# Altium PCB PCB_Wand Controller.pcbdoc
Units mm, origin at the board's own origin, x right, y up, seen from the top; angles counter-clockwise.
Board outline 158.8 x 145.8 mm, 2 copper layers (Top Layer, Bottom Layer); 32 components, 43 nets, 132 pads, 44 vias.
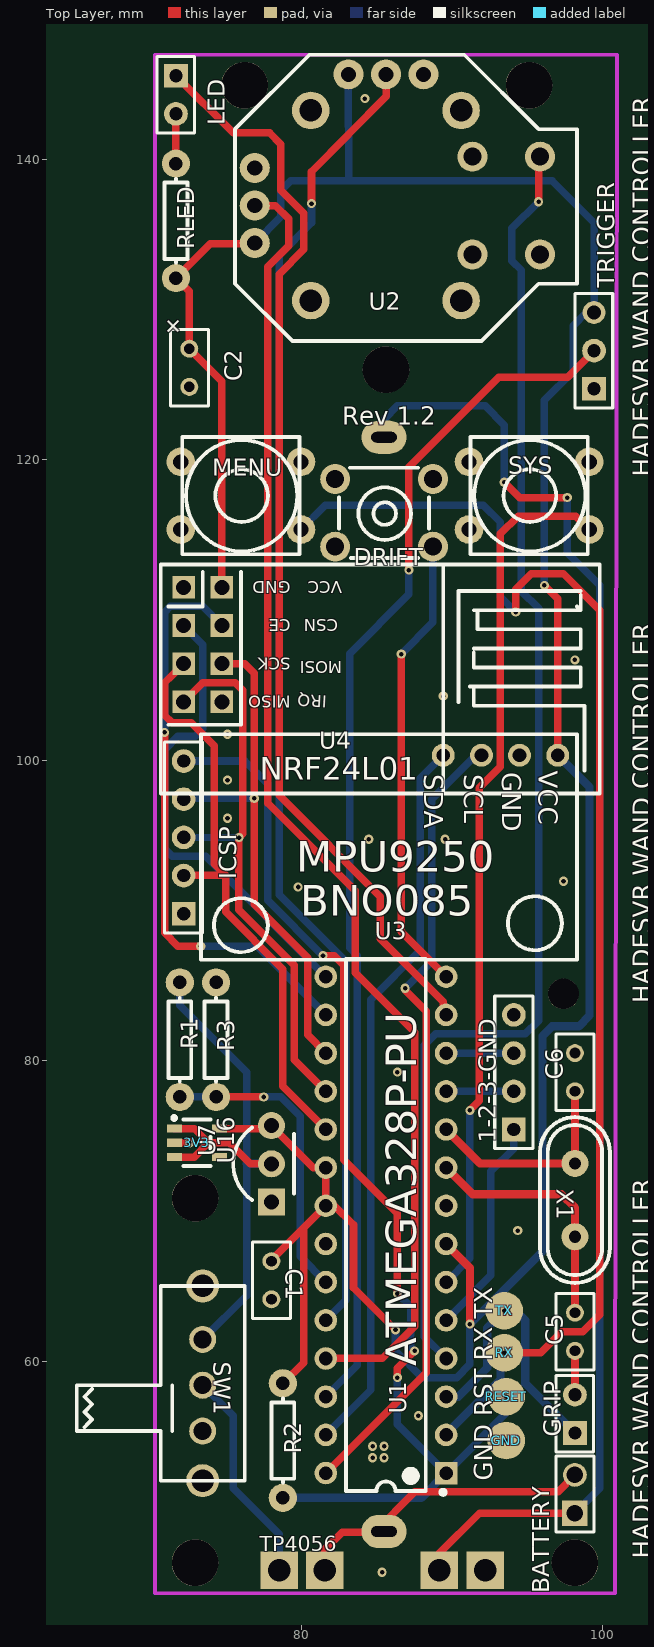
[diagram p0: Top Layer view]
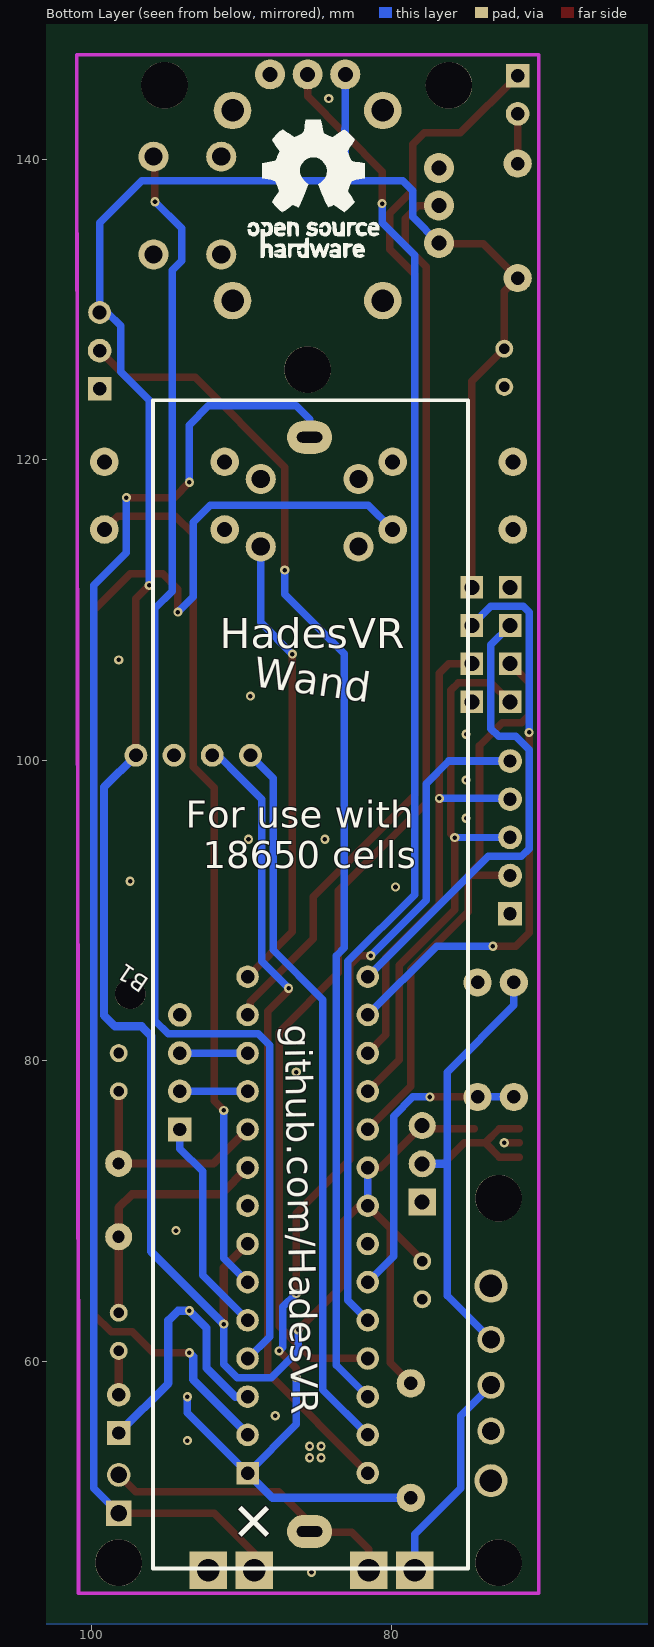
[diagram p1: Bottom Layer view, seen from below]

## Layer stack, top to bottom
Top Layer: signal copper (thickness not stored)
Dielectric: dielectric 0.32, FR-4, Dk 4.8
Bottom Layer: signal copper (thickness not stored)

## Board outline
184.201,25.4 25.4,25.4 25.4,171.196 184.201,171.196

## Components (designator, comment, footprint, x,y, rotation, side; value= is the part's Value field where it differs from the comment)
1-2-3-GND "HDR-M-2.54_1x4" HDR-M-2.54_1X4 94.107,79.248 r90 top
3V3 "LP5907MFX-3.0/NOPB" SOT-23-5_L3.0-W1.7-P0.95-LS2.8-BL 73.025,74.549 r270 top
#LOGO1 "Graphic_Logo_Open_Hardware_Small" OPEN_HARDWARE 248.793,212.344 r0 bottom
B1 "18650 Holder" BH-18650-A 85.471,85.09 r270 bottom
BATTERY "HDR-M-2.54_1x2" HDR-M-2.54_1X2 98.171,51.181 r270 top
C1 "100nF" RAD-0.1 77.978,65.405 r90 top
C2 "100nF" RAD-0.1 72.517,126.111 r90 top
C5 "22pF" RAD-0.1 98.171,61.976 r90 top
C6 "22pF" RAD-0.1 98.171,79.248 r270 top
DRIFT "button6*6*8" KEY-TH_4P-L6.0-W6.0-P4.50-LS7.5 85.471,116.459 r180 top
GND "RX" "TEST PAD FOOTPRINT" 93.599,54.737 r0 top
GRIP "HDR-F-2.54_1x2" HDR-F-2.54_1X2#1 98.171,56.515 r90 top
ICSP "HDR-M-2.54_1x5" HDR-M-2.54_1X5 72.136,94.869 r90 top
LED "HDR-F-2.54_1x2" HDR-F-2.54_1X2#2 71.628,144.272 r90 top
MENU "MenuBTN" SQUISHY_TACT_8*8*5 75.946,117.602 r180 top
R1 "1k" R_AXIAL-0.3 71.882,81.407 r270 top
R2 "10k" R_AXIAL-0.3 78.74,54.737 r90 top
R3 "3.3k" R_AXIAL-0.3 74.295,81.407 r90 top
RESET "RX" "TEST PAD FOOTPRINT" 93.599,57.658 r0 top
RLED "1k" R_AXIAL-0.3 71.628,135.89 r90 top
RX "RX" "TEST PAD FOOTPRINT" 93.472,60.579 r0 top
SW1 "Toggle SwitchesSK-12F14 G5" SW-TH_SK-12F14-G 73.406,58.547 r180 top
SYS "SysBTN" SQUISHY_TACT_8*8*5 95.123,117.602 r180 top
TRIGGER "HDR-F-2.54_1x3" HDR-F-2.54_1X3 99.441,127.254 r90 top
TX "TX" "TEST PAD FOOTPRINT" 93.472,63.373 r0 top
U1 "ATMEGA328P-PU" DIP-28_L34.6-W7.3-P2.54-LS10.2-BL 85.598,69.088 r90 top
U2 "PS4 joystick" "PS4 JOYSTICK" 85.598,136.906 r0 top
U3 "MPU9250" MPU9250 91.948,100.33 r270 top
U4 "NRF24L01" MOD-NRF24L01 72.136,111.506 r180 top
U16 "TO-92-3_L4.9-W3.7-P2.54-L" TO-92-3_L4.9-W3.7-P2.54-L 77.978,73.152 r90 top
X1 "16MHZ" HC-49US_L11.0-W4.6-P4.88 98.171,70.739 r270 top
? "" ? 120.968,147.878 r0 top

## Footprints (in the part's own frame and the unit in brackets; to place one, negate y for a bottom-side part, rotate by r counter-clockwise, add the part's x,y. Pads: shape width x height; smd on the part's side, far side on the other; paste and mask are expansions set on the pad)
BH-18650-A [mm]
  oval 2.2x3 hole 0.7 slot 1.7 at 90 deg: 1(36.4,0) 2(-36.4,0)
  silkscreen extent -38.86,-10.41 38.86,10.54
DIP-28_L34.6-W7.3-P2.54-LS10.2-BL [mm]
  rect 1.5x1.5 hole 0.9: 1(-16.51,-4)
  round 1.5 hole 0.9: 2(-13.97,-4) 3(-11.43,-4) 4(-8.89,-4) 5(-6.35,-4) 6(-3.81,-4) 7(-1.27,-4) 8(1.27,-4) 9(3.81,-4) 10(6.35,-4) 11(8.89,-4) 12(11.43,-4) 13(13.97,-4) 14(16.51,-4) 15(16.51,4) 16(13.97,4) 17(11.43,4) 18(8.89,4) 19(6.35,4) 20(3.81,4) 21(1.27,4) 22(-1.27,4) 23(-3.81,4) 24(-6.35,4) 25(-8.89,4) 26(-11.43,4) 27(-13.97,4) 28(-16.51,4)
  silkscreen extent -17.94,-3.95 17.7,2.65
HC-49US_L11.0-W4.6-P4.88 [mm]
  round 1.8 hole 0.8: 1(-2.44,0) 2(2.44,0)
  silkscreen extent -5.51,-2.32 5.51,2.32
HDR-F-2.54_1X2#1 [mil]
  rect 62x62 hole 35: 1(-50,0)
  round 62 hole 35: 2(50,0)
  silkscreen extent -100,-49 100,50
HDR-F-2.54_1X2#2 [mil]
  round 62 hole 35: 1(-50,0)
  rect 62x62 hole 35: 2(50,0)
  silkscreen extent -100,-49 100,50
HDR-F-2.54_1X3 [mil]
  rect 62x62 hole 35: 1(-100,0)
  round 62 hole 35: 2(0,0)
  round 60 hole 36: 3(100,0)
  silkscreen extent -150,-49 150,50
HDR-M-2.54_1X2 [mm]
  round 1.575 hole 1.1: 1(-1.27,0)
  rect 1.7x1.7 hole 1.1: 2(1.27,0)
  silkscreen extent -2.54,-1.27 2.54,1.27
HDR-M-2.54_1X4 [mil]
  rect 62x62 hole 35: 1(-150,0)
  round 62 hole 35: 2(-50,0) 3(50,0) 4(150,0)
  silkscreen extent -200,-50 200,50
HDR-M-2.54_1X5 [mil]
  rect 62x62 hole 35: 1(-200,0)
  round 62 hole 35: 2(-100,0) 3(0,0) 4(100,0) 5(200,0)
  silkscreen extent -250,-50 250,50
KEY-TH_4P-L6.0-W6.0-P4.50-LS7.5 [mm]
  round 2 hole 1.2: 1(-3.25,-2.25) 2(3.25,-2.25) 3(3.25,2.25) 4(-3.25,2.25)
  silkscreen extent -3,-3 3,3
MOD-NRF24L01 [mm]
  rect 1.501x1.501 hole 1.001: 1(0,0) 2(-2.54,0) 3(0,2.54) 4(-2.54,2.54) 5(0,5.08) 6(-2.54,5.08) 7(0,7.62) 8(-2.54,7.62)
  silkscreen extent -27.69,-1.52 1.52,13.72
MPU9250 [mil]
  round 60 hole 36: 1(0,200) 2(0,100) 3(0,0) 4(0,-100)
  silkscreen extent -55,-734 536,250
OPEN_HARDWARE [mm]
  silkscreen extent -167.94,69.72 -159.2,78.92
"PS4 JOYSTICK" [mm]
  round 2 hole 1: 1(-8.73,-2.5) 2(-8.73,0) 3(-8.73,2.5) 4(-2.5,8.73) 5(0,8.73) 6(2.5,8.73)
  round 2 hole 1.2: 7(5.75,3.25) 8(10.25,3.25) 9(10.25,-3.25) 10(5.75,-3.25)
  round 2.5 hole 1.5: 11(-5,-6.325) 12(-5,6.325) 13(5,6.325) 14(5,-6.325)
  silkscreen extent -10.03,-9.02 12.7,10.03
R_AXIAL-0.3 [mil]
  round 74 hole 35.4: 1(-150,0) 2(150,0)
  silkscreen extent -110,-30 110,30
RAD-0.1 [mil]
  round 47 hole 28: 1(-50,0) 2(50,0)
  silkscreen extent -100,-50 100,50
SOT-23-5_L3.0-W1.7-P0.95-LS2.8-BL [mm]
  rect 0.55x1 smd: 1(-0.95,-1.5) 2(0,-1.5) 3(0.95,-1.5) 4(0.95,1.5) 5(-0.95,1.5)
  silkscreen extent -1.78,-1.65 1.55,0.9
SQUISHY_TACT_8*8*5 [mm]
  round 1.9 hole 1: 1(-4,2.25) 2(-4,-2.25) 3(4,2.25) 4(4,-2.25)
  silkscreen extent -3.9,-3.9 3.9,3.9
SW-TH_SK-12F14-G [mm]
  round 1.8 hole 1.2: 1(0,0.127) 2(0,-2.921) 3(0,3.175)
  round 2.2 hole 1.5: 4(0,-6.477) 5(0,6.477)
  silkscreen extent -2.79,-6.48 8.38,6.48
"TEST PAD FOOTPRINT" [mm]
  round 2.5 smd: 1(0,0)
TO-92-3_L4.9-W3.7-P2.54-L [mm]
  rect 1.8x1.8 hole 1: 1(-2.54,0)
  round 1.8 hole 1: 2(0,0) 3(2.54,0)
  silkscreen extent -2.41,-1.5 2.41,2.54
? [mm]

## Free pads (board coordinates)
  rect 2.5x2.5 hole 1.499: 3(92.203,46.1) 4(89.154,46.101) 5(81.534,46.101) 6(78.486,46.101)
  round 3.1 hole 3.1 unplated: ""(72.898,46.609) ""(72.898,70.866) ""(76.2,144.907) ""(85.598,125.984) ""(95.123,144.907) ""(98.171,46.609)
  round 2.032 hole 2.032 unplated: ""(97.409,84.455)

## Via types
v1: diameter 0.61, hole 0.305, Top Layer to Bottom Layer, 44 vias

## Nets (pads, with @x,y where several pads share a name; then routed paths per layer and width w, separated by ;. In a path a pad name is that pad's centre, name@x,y a point inside that pad or via, vN(x,y) a via of type N, cw(c..) or ccw(c..) an arc to the next point about the centre after c; other vN are vias at no path point)
3V3: 3V3.5 C1.2 C2.2 R2.2 RLED.1 TRIGGER.3 U1.7 U1.20 U1.21 U2.1 U2.4 U3.1 U4.2 U16.3 | length 198.2
  Top Layer w0.5: RLED.1 73.913,134.367 76.867,134.367 U2.1 ; RLED.1 72.517,131.191 C2.2 74.676,125.222 U4.2 ; 3V3.5 77.785,75.499 U16.3 80.772,72.898 U1.20 U1.21 ; C1.2 77.978,66.738 U1.21 ; R2.2 80.116,59.923 80.116,68.876 ; v1(86.233,62.103) 83.439,64.897 83.439,69.088 82.169,70.358 U1.21 ; v1(96.139,111.633) 97.028,110.744 U3.1
  Top Layer w0.55: U1.7 91.186,66.23 v1(91.186,62.484)
  Bottom Layer w0.5: U2.1@76.867,134.405 78.612,136.15 78.612,137.89 79.273,138.558 96.646,138.558 99.44,135.764 TRIGGER.3 98.92,129.79 98.043,128.9 98.043,125.856 96.139,123.952 v1(96.139,111.633) ; U1.21 U1.20 ; U2.4 83.116,138.558 ; v1(86.233,62.103) 86.233,60.706 88.011,58.928 90.297,58.928 91.186,59.817 v1(91.186,62.484)
  Bottom Layer w0.55: v1(91.186,62.484) 96.012,67.31 96.012,81.661 96.647,82.296 98.425,82.296 99.143,83.013 99.143,98.215 U3.1
AXISX: U1.24 U2.5 | length 88.2
  Top Layer w0.5: v1(80.645,137.033) 80.644,139.144 85.607,144.174 U2.5
  Bottom Layer w0.5: v1(80.645,137.033) 80.644,135.764 78.485,133.605 78.485,91.06 82.93,86.615 82.93,64.072 U1.24
AXISY: U1.25 U2.2 | length 87.7
  Top Layer w0.5: U2.2 78.231,136.907 79.12,136.018 79.12,134.24 77.723,132.843 77.723,97.156 83.565,91.314 83.565,85.853 87.502,81.916 87.502,62.358 85.343,60.199 U1.25
CE: U1.15 U4.3 | length 31.4
  Bottom Layer w0.5: U4.3 73.406,107.696 73.406,102.108 72.898,101.6 71.755,101.6 70.866,100.711 70.866,94.107 71.374,93.599 73.597,93.599 U1.15
CSN: U1.16 U4.4 | length 38.8
  Top Layer w0.5: v1(70.866,101.854) 70.866,88.519 71.754,87.631 v1(73.279,87.63)
  Bottom Layer w0.5: v1(70.866,101.854) 70.866,109.855 71.247,110.236 73.406,110.236 U4.4 ; v1(73.279,87.63) 77.026,87.63 U1.16
DRIFT: DRIFT.4 U1.14 | length 30.7
  Top Layer w0.5: v1(86.614,107.061) 86.614,88.582 U1.14
  Bottom Layer w0.5: v1(86.614,107.061) 88.721,109.168 DRIFT.4
DRIFT_1: DRIFT.1
DRIFT_3: DRIFT.3
GND: 1-2-3-GND.4 3V3.2 C1.1 C2.1 C5.1 C6.1 DRIFT.2 GND.1 GRIP.2 ICSP.1 MENU.2 MENU.4 pad.3 R3.2 SW1.4 SW1.5 SYS.2 SYS.4 TRIGGER.1 U1.8 U1.22 U2.3 U2.6 U2.7 U2.11 U2.12 U2.13 U2.14 U3.2 U4.1 U16.1 | length 3.9
  Top Layer w0.5: 3V3.2 v1(72.517,74.549)
  Top Layer w0.55: GRIP.2 C5.1
  other v1: 85.344,45.974 84.709,53.594 85.471,53.594 84.709,54.356 85.471,54.356 93.599,54.737 87.757,56.388 94.361,68.707 86.36,79.248 79.756,91.567 97.409,91.948 84.455,94.742 89.535,94.742 75.057,96.139 75.057,98.679 75.057,101.727 89.408,104.267 98.171,106.68 84.201,144.018
GRIP: GRIP.1 TX.1 U1.3 | length 18.3
  Bottom Layer w0.55: U1.3 90.424,57.658 92.329,59.563 92.329,62.23 v1(93.472,63.373) ; v1(93.472,63.373) 94.233,63.374 94.868,62.739 94.868,58.548 GRIP.1
JOYBTN: U1.4 U2.8 | length 89.4
  Top Layer w0.5: U2.8@95.721,140.791 95.757,140.754 v1(95.757,137.161)
  Bottom Layer w0.5: U1.4 88.137,61.659 88.137,81.027 88.899,81.789 94.868,81.789 95.757,82.678 95.757,110.11 94.614,111.253 94.614,114.174 ; 94.614,118.873 94.614,115.063 94.615,114.173 ; 94.615,118.872 94.615,132.588 93.979,133.224 93.979,135.393 v1@95.757,137.171
LED: LED.2 U1.13 | length 72.7
  Top Layer w0.5: LED.2 75.437,141.733 77.85,141.733 78.612,140.971 78.612,137.923 80.136,136.399 80.136,133.986 78.485,132.332 78.485,97.664 85.216,90.933 85.216,88.139 89.407,83.948 89.407,83.249 U1.13
LEDB: 1-2-3-GND.3 U1.12 | length 4.6
  Bottom Layer w0.5: U1.12 93.98,80.518 1-2-3-GND.3@94.107,80.391
LEDG: 1-2-3-GND.2 U1.11 | length 4.5
  Bottom Layer w0.5: U1.11 1-2-3-GND.2
LEDR: 1-2-3-GND.1 U1.5 | length 14.6
  Bottom Layer w0.5: U1.5 92.583,65.723 92.583,72.644 94.107,74.168 1-2-3-GND.1
MENU: MENU.1 RX.1 U1.2 | length 90.7
  Top Layer w0.5: v1(93.472,60.579) 95.885,60.579 97.282,61.976 98.679,61.976 99.822,63.119 99.822,109.982 97.409,112.395 95.25,112.395 94.234,111.379 v1(94.234,109.855)
  Bottom Layer w0.5: MENU.1 81.561,116.967 92.075,116.967 93.218,115.824 93.218,110.871 v1(94.234,109.855)
  Bottom Layer w0.55: U1.2 89.598,55.181 93.218,58.801 93.218,60.325 v1(93.472,60.579)
MENU_2: MENU.3
MISO: ICSP.3 U1.18 U4.7 | length 37.5
  Top Layer w0.5: U4.7 73.406,105.156 75.565,105.156 76.073,104.648 76.073,95.107 v1(75.819,94.853) 75.819,90.043 79.502,86.36 79.502,80.074 U1.18
  Bottom Layer w0.5: ICSP.3 v1(75.819,94.853)
MOSI: ICSP.4 U1.17 U4.6 | length 34.4
  Top Layer w0.5: U4.6 76.2,106.426 76.835,105.791 v1(76.835,97.459) ; v1(76.835,97.459) 76.834,90.425 80.39,86.869 80.39,81.725 U1.17
  Bottom Layer w0.5: ICSP.4 72.187,97.459 v1(76.835,97.459)
RESET: ICSP.5 R2.1 RESET.1 U1.1 | length 76.7
  Top Layer w0.5: v1(81.407,86.995) 82.168,86.996 82.803,86.361 82.803,73.407 86.359,69.851 v1(86.359,64.517) ; v1(86.36,58.928) 86.36,59.563 v1(87.503,60.706)
  Bottom Layer w0.5: ICSP.5 76.199,99.95 77.723,98.426 77.723,90.679 v1(81.407,86.995) ; v1(86.359,64.517) 87.248,63.628 87.248,60.961 v1(87.503,60.706) ; v1(86.36,58.928) 86.36,55.816 U1.1 93.599,56.579 v1(93.599,57.658)
  Bottom Layer w0.55: R2.1 87.947,50.927 U1.1
RLED_2: LED.1 RLED.2 | length 3.3
  Top Layer w0.5: RLED.2 LED.1
S$11: 
S$17: 
S$30: 
S$32: 
S$22030: 
SCK: ICSP.2 U1.19 U4.5 | length 39.5
  Top Layer w0.5: U4.5 71.366,105.654 70.865,105.157 70.865,102.998 71.373,102.49 72.643,102.49 74.167,100.966 74.167,93.122 74.929,92.36 ; ICSP.2 72.167,92.36 74.93,92.36 74.93,89.916 78.74,86.106 78.74,78.296 U1.19
SCL: U1.28 U3.3 | length 53.4
  Top Layer w0.5: U1.28 88.265,59.245 88.265,83.312 86.868,84.709 v1(86.868,84.836)
  Bottom Layer w0.5: v1(86.868,84.836) 88.645,86.613 88.645,97.41 90.045,98.809 91.566,100.331 U3.3
SDA: U1.27 U3.4 | length 48.4
  Bottom Layer w0.5: U1.27 84.581,58.103 84.581,84.075 87.883,87.377 87.883,98.805 U3.4
SW1_3: SW1.3
SYS: SYS.1 U1.6 | length 58
  Top Layer w0.5: v1(91.186,76.708) 91.82,77.342 91.82,98.169 93.217,99.569 93.217,115.063 94.398,116.241 98.234,116.241 SYS.1
  Bottom Layer w0.5: U1.6 91.186,66.866 v1(91.186,76.708)
SYS_2: SYS.3
TRIGG: TRIGGER.2 U1.26 | length 80.1
  Top Layer w0.5: v1(87.122,112.649) 87.121,119.508 93.093,125.477 97.68,125.477 TRIGGER.2
  Bottom Layer w0.5: U1.26@81.599,57.669 83.682,59.752 83.682,87.006 83.174,87.514 83.174,107.097 87.122,111.045 v1(87.122,112.649)
U1_9: C5.2 U1.9 X1.2 | length 16.7
  Top Layer w0.55: U1.9 91.376,71.12 97.282,71.12 98.171,70.231 X1.2 C5.2
U1_10: C6.2 U1.10 X1.1 | length 14.3
  Top Layer w0.55: U1.10 91.857,73.179 X1.1 C6.2
U1_23: R1.2 R3.1 U1.23 | length 20.3
  Top Layer w0.5: R3.1 v1(77.47,77.597)
  Bottom Layer w0.5: R1.2 R3.1 ; v1(77.47,77.597) 78.612,77.598 79.882,76.328 79.882,66.993 U1.23
U2_9: U2.9
U2_10: U2.10
U4_8: U4.8
U5_4: B1.2 BATTERY.2 pad.4 | length 99.8
  Top Layer w0.5: pad.4@89.153,45.213 89.153,47.242 91.823,49.912 BATTERY.2 ; v1(93.472,118.491) 94.488,117.475 v1(97.663,117.475)
  Bottom Layer w0.5: B1.2@85.47,121.489 85.47,122.683 86.359,123.572 92.201,123.572 93.471,122.302 v1(93.472,118.491) ; v1(97.663,117.475) 97.663,113.792 99.821,111.634 99.821,51.563 BATTERY.2
U5_5: B1.1 BATTERY.1 pad.5 | length 21
  Top Layer w0.5: pad.5@81.533,45.213 81.533,47.499 82.679,48.642 84.835,48.642 87.523,51.326 97.048,51.326 BATTERY.1
U5_6: pad.6 SW1.1 | length 15.3
  Bottom Layer w0.5: SW1.1@73.395,58.431 75.427,56.399 75.427,51.573 78.485,48.515 pad.6@78.485,45.213
VBAT: 3V3.1 3V3.3 R1.1 SW1.2 U16.2 | length 38.5
  Top Layer w0.5: 3V3.3 72.837,73.599 73.787,74.549 ; 3V3.1 72.837,75.499 73.787,74.549 ; U16.2 76.581,73.152 75.184,74.549 73.787,74.549
  Bottom Layer w0.5: R1.1 71.881,83.694 76.326,79.249 76.326,64.39 SW1.2
  Bottom Layer w0.55: 76.326,73.152 U16.2
pads on no net: 3V3.4

## Polygon pours and split planes (outlines as drawn)
GND on Top Layer (solid): 58.928,153.67 62.738,157.48 134.874,157.48 134.747,157.353 134.747,104.648 140.462,98.933 140.716,98.933 140.208,98.425 140.208,83.693 134.493,77.978 134.493,39.624 132.969,38.1 49.784,38.1 49.784,38.481
GND on Bottom Layer (solid): 52.07,158.496 59.182,151.384 134.493,151.384 135.128,150.749 135.128,104.394 139.954,99.568 139.954,97.282 136.525,93.853 136.525,88.392 134.493,86.36 134.493,42.545 38.1,42.545

## Silkscreen, mask and mechanical layers (free items; w line width, h text height)
Top Overlay:
  text "+" at 71.585,129.71 h1.2 r225
  text "Rev 1.2" at 82.677,122.336 h1.2
  text "HADESVR WAND CONTROLLER" at 103.216,118.872 h1.2 r90
  text "MPU9250" at 79.629,92.583 h2.03
  text "BNO085" at 79.883,89.662 h2.03
  text "HADESVR WAND CONTROLLER" at 103.216,83.82 h1.2 r90
  text "U7" at 74.231,73.66 h1.14 r90
  text "ATMEGA328P-PU" at 87.63,59.69 h2.03 r90
  text "GND RST RX TX" at 92.675,52.07 h1.2 r90
  text "TP4056" at 77.216,47.379 h1
  text "HADESVR WAND CONTROLLER" at 103.216,46.863 h1.2 r90
Bottom Overlay:
  text "HadesVR" at 91.44,107.458 h2
  text "Wand" at 89.293,104.928 h2 r8
  text "For use with" at 93.726,95.493 h1.8
  text "18650 cells" at 92.583,92.826 h1.8
  text "github.com/HadesVR" at 87.133,82.407 h1.8 r89

## Text inside footprints (layer, text, board x,y; h text height)
B1: Bottom Overlay "+" at 89.49,47.199 h3 r315
U3: Top Overlay "VCC" at 95.758,99.314 h1.27 r270; Top Overlay "GND" at 93.345,99.187 h1.27 r270; Top Overlay "SCL" at 90.805,99.06 h1.27 r270; Top Overlay "SDA" at 88.138,99.06 h1.27 r270
U4: Top Overlay "IRQ" at 81.682,104.285 h0.8 r177; Top Overlay "MOSI" at 82.677,106.572 h0.8 r180; Top Overlay "CSN" at 82.423,109.366 h0.8 r180; Top Overlay "VCC" at 82.677,111.906 h0.8 r180; Top Overlay "MISO" at 79.248,104.286 h0.8 r180; Top Overlay "SCK" at 79.248,106.826 h0.8 r180; Top Overlay "CE" at 79.248,109.366 h0.8 r180; Top Overlay "GND" at 79.248,111.906 h0.8 r180